# Altium PCB ESP32_Interfaces_Board_v02b1.PcbDoc
Units mm, origin at the board's own origin, x right, y up, seen from the top; angles counter-clockwise.
Board outline 89.05 x 84.48 mm, 2 copper layers (Top Layer, Bottom Layer), stack 0.325 mm thick; 53 components, 39 nets, 184 pads, 622 vias.
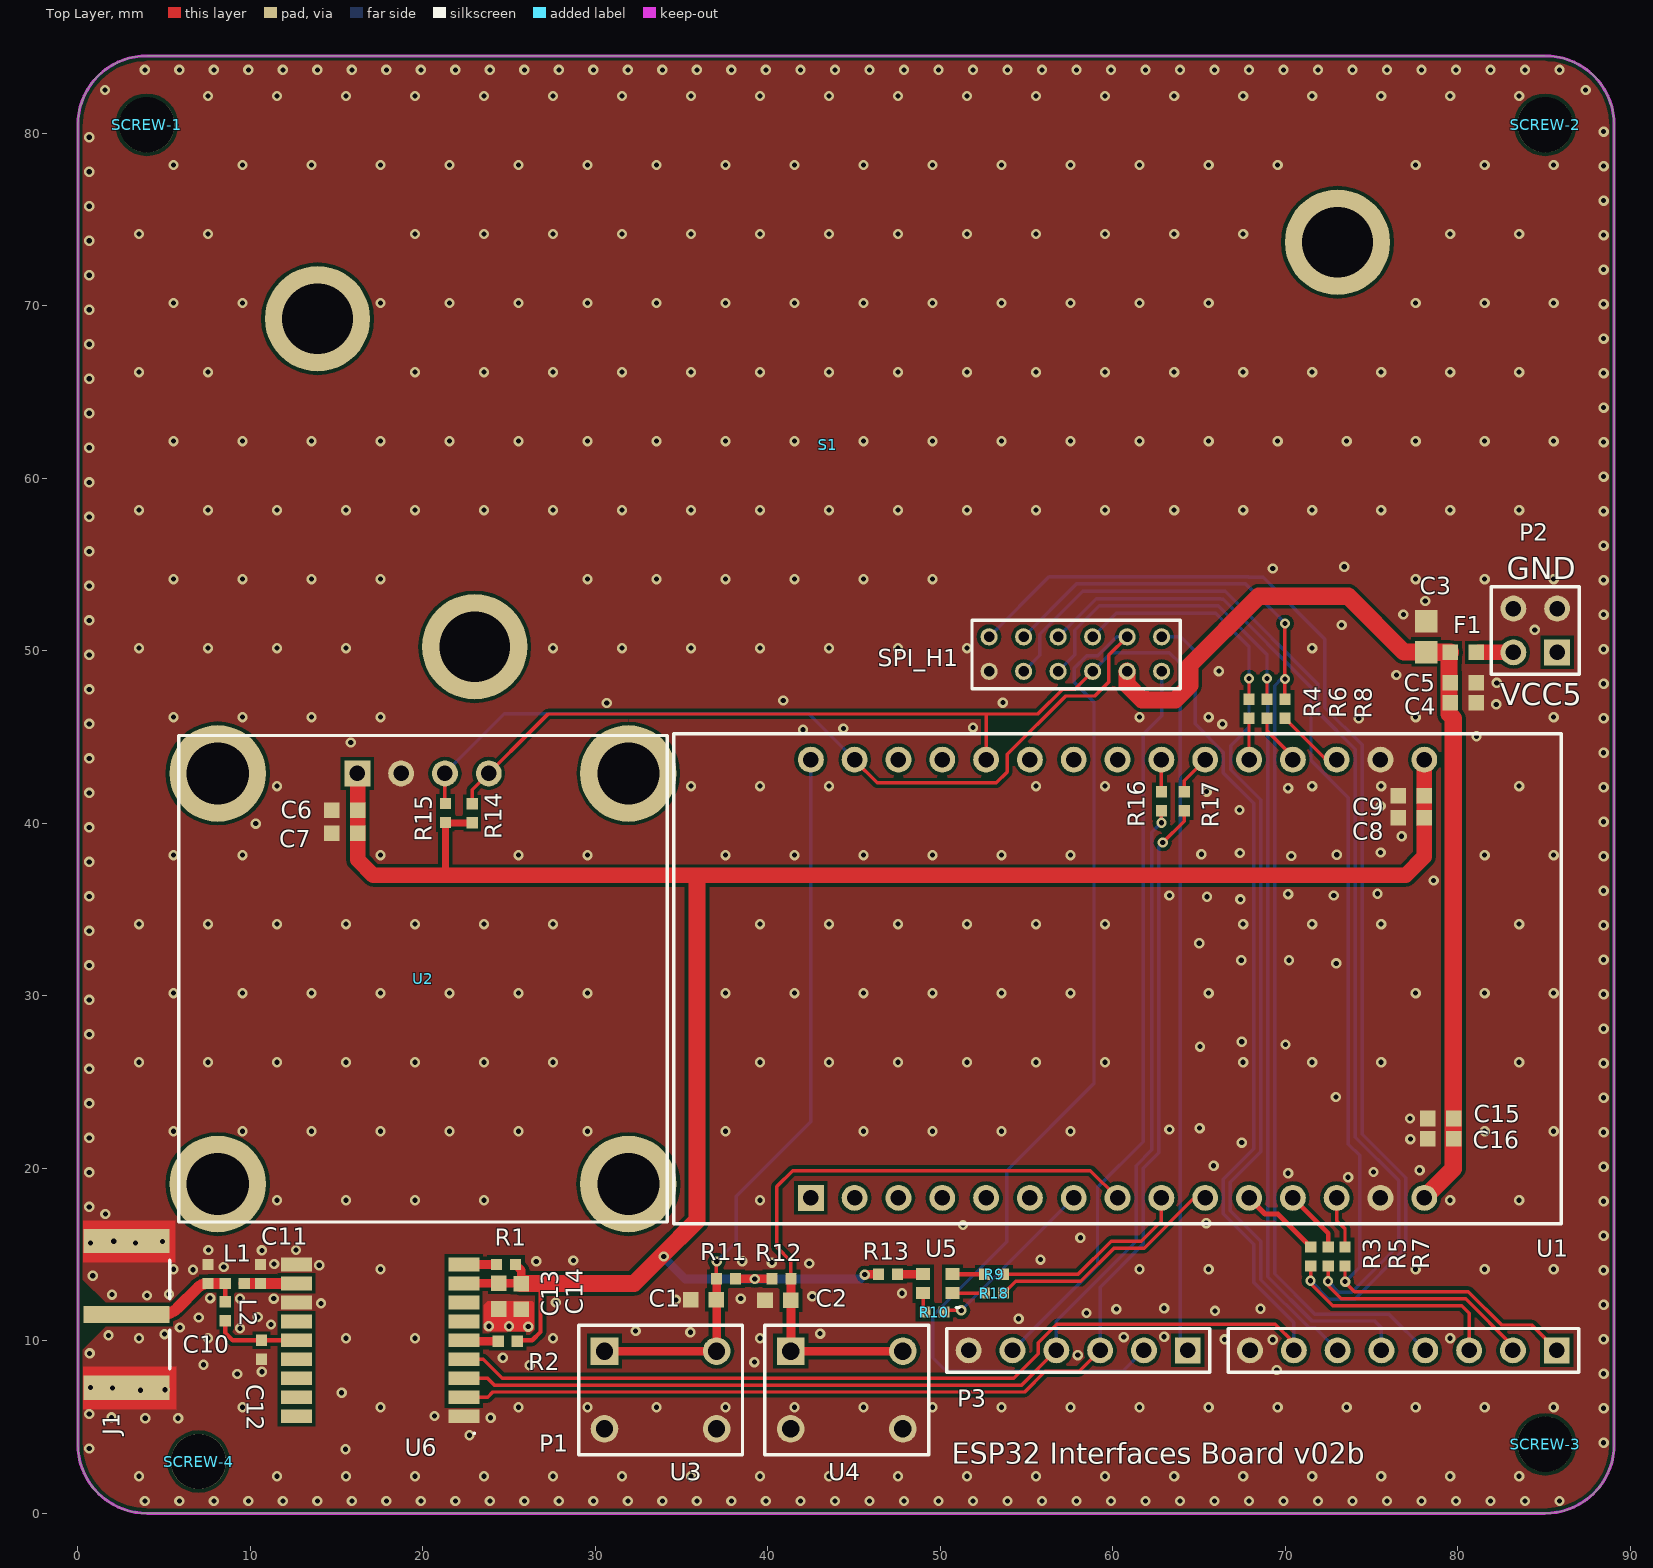
[diagram p0: Top Layer view]
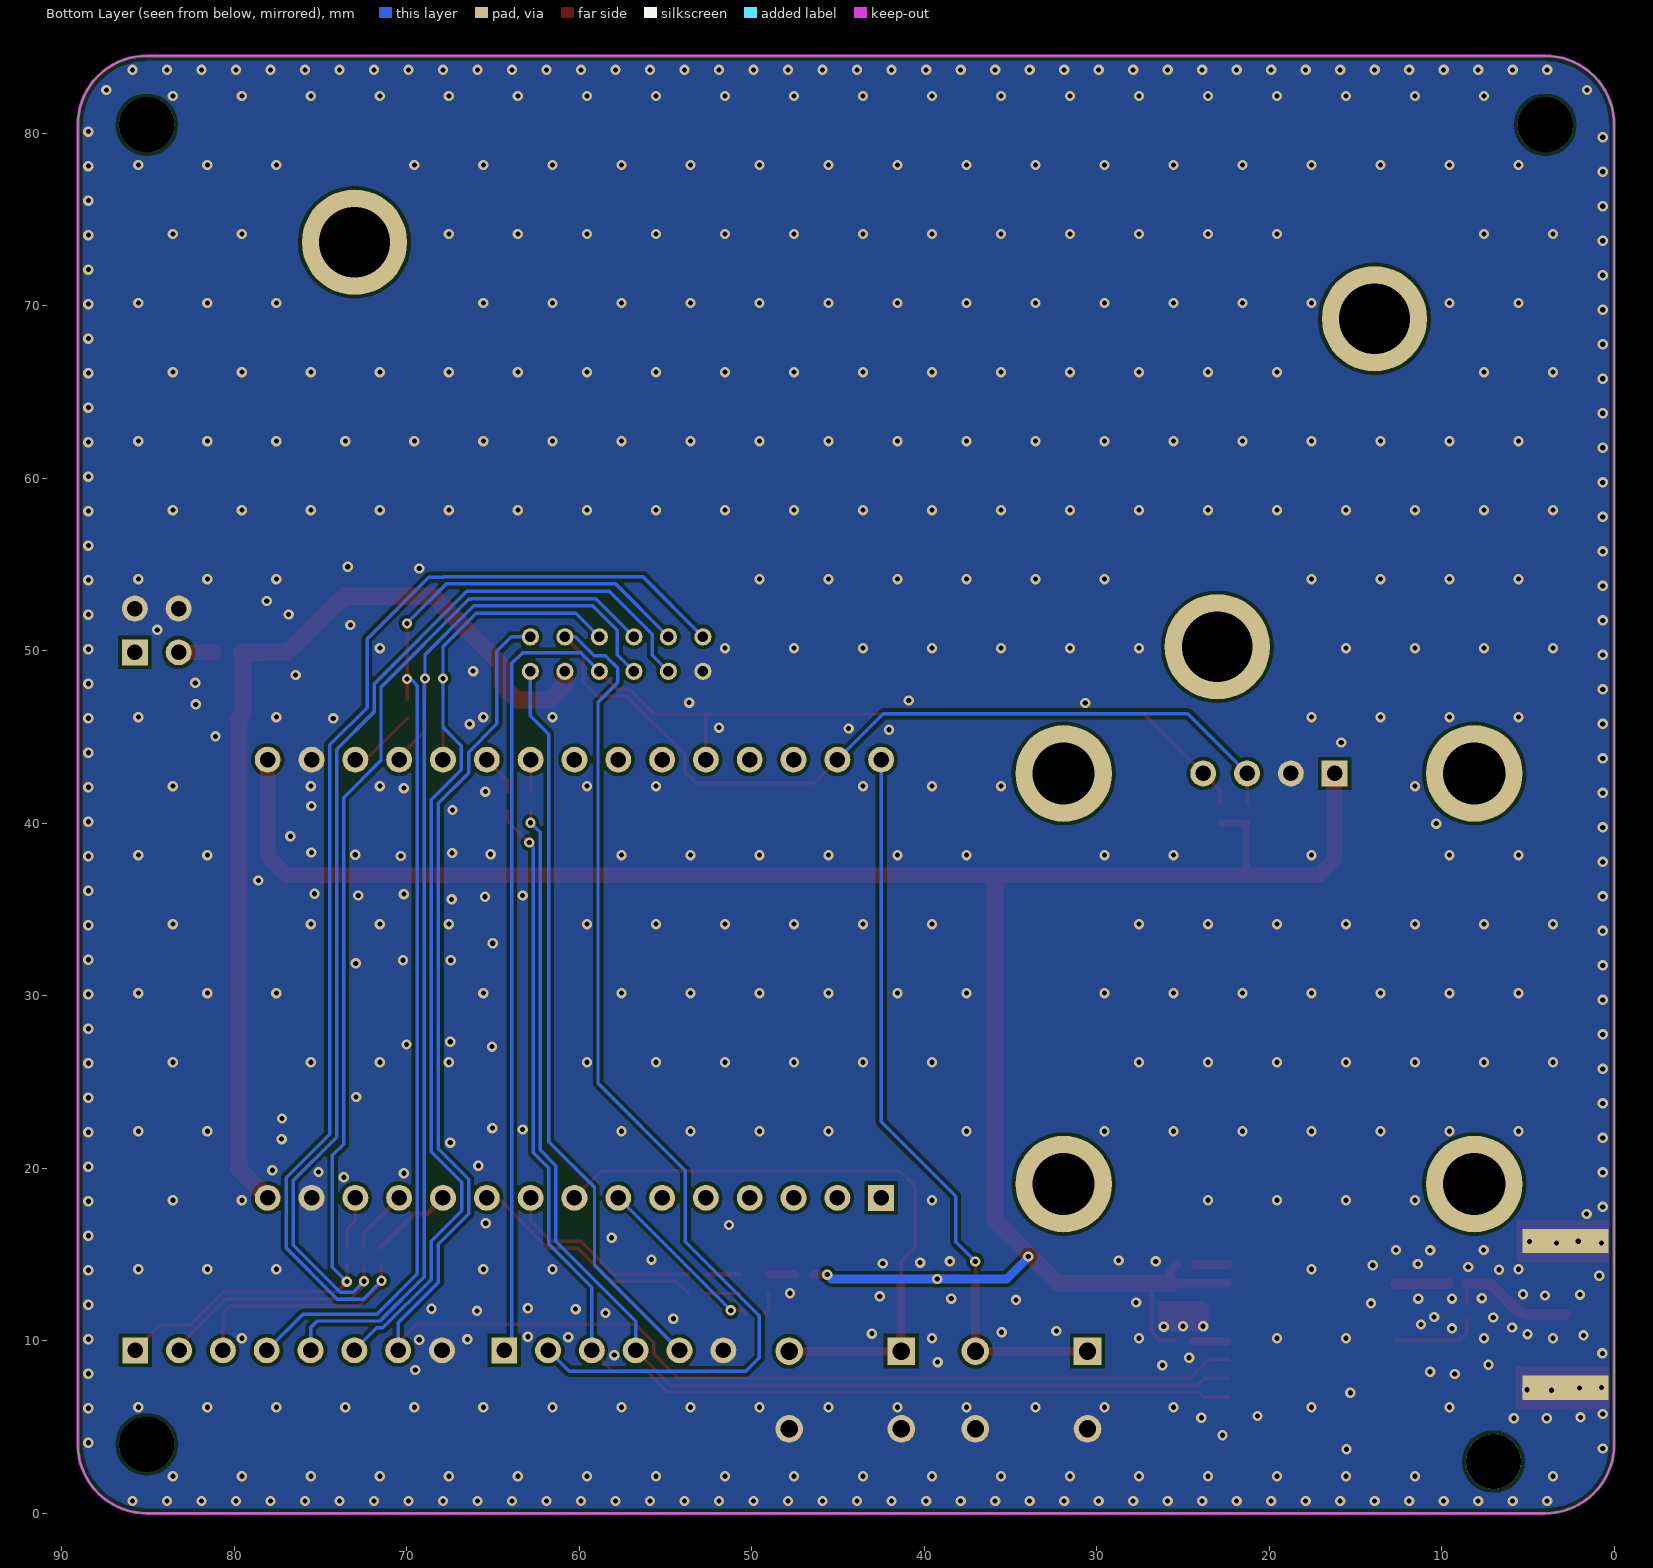
[diagram p1: Bottom Layer view, seen from below]

## Layer stack, top to bottom
Top Solder: solder mask 0.0102, Solder Resist, Dk 3.5
Top Layer: signal copper 0.0356
Dielectric 1: core 0.254, FR-4, Dk 4.2
Bottom Layer: signal copper 0.0356
Bottom Solder: solder mask 0.0102, Solder Resist, Dk 3.5

## Board outline
0,4 ccw(c4,4) 4,0 85.055,0 ccw(c85.055,4) 89.055,4 89.055,80.483 ccw(c85.055,80.483) 85.055,84.483 4,84.483 ccw(c4,80.483) 0,80.483

## Design rules (kind name [scope] priority, off if disabled: settings)
Clearance [All] p1: gap=0.203 ignorepadtopadclearanceinfootprint=FALSE
HoleSize [All] p1: absolutevalues=TRUE maxlimit=4 minlimit=0.025 maxpercent=80.000 minpercent=20.000
MinimumSolderMaskSliver [All] p1: minsoldermaskwidth=0.1
PolygonConnect [All] p1: connectstyle=Direct reliefconductorwidth=0.381 reliefentries=4 polygonreliefangle="90 Angle" airgapwidth=0.254
RoomDefinition ESP32-Interfacesv01a [InComponentClass('ESP32-Interfacesv01a')] p1: confinementstyle=ConfineOut formatcopy=TRUE lockcomponents=FALSE outline -27.946,1.932 -20.275,1.932 -20.275,15.089 -27.946,15.089
RoutingVias [All] p1: holewidth=0.3 width=0.6 viastyle="Through Hole" minholewidth=0.2 minwidth=0.4 maxholewidth=0.711 maxwidth=1.27
SilkToSilkClearance [All] p1: silktosilkclearance=0
SolderMaskExpansion [All] p1: expansion=0.05
Width [All] p1: maxlimit=1.27 minlimit=0.178 preferedwidth=0.254 minimp=50.000000 maximp=50.000000 favimp=50.000000
27 further rules are at their usual default settings.

## Components (designator, comment, footprint, x,y, rotation, side; value= is the part's Value field where it differs from the comment)
C1 "Cap" rlc_603_smd 36.265,12.371 r180 top value=100nF
C2 "Cap" rlc_603_smd 40.583,12.346 r180 top value=100nF
C3 "Cap" rlc_805_smd 78.156,50.819 r270 top value=10u
C4 "Cap" rlc_603_smd 80.315,46.983 r180 top value=100n
C5 "Cap" rlc_603_smd 80.315,48.152 r180 top value=100pF
C6 "Cap" rlc_603_smd 15.469,40.742 r180 top value=1uF
C7 "Cap" rlc_603_smd 15.469,39.421 r180 top value=100pF
C8 "Cap" rlc_603_smd 77.286,40.311 r180 top value=100pF
C9 "Cap" rlc_603_smd 77.286,41.581 r180 top value=1uF
C10 "Cap" rlc_402_smd 7.544,13.876 r90 top value=NC
C11 "Cap" rlc_402_smd 10.592,13.876 r270 top value=NC
C12 "Cap" rlc_402_smd 10.648,9.476 r90 top value=NC
C13 "Cap" rlc_603_smd 24.41,12.592 r90 top value=1uF
C14 "Cap" rlc_603_smd 25.705,12.566 r90 top value=100pF
C15 "Cap" rlc_603_smd 78.994,22.885 r180 top value=100pF
C16 "Cap" rlc_603_smd 78.994,21.717 r180 top value=1uF
F1 "Ferrite beads" rlc_603_smd 80.315,49.904 r180 top value=VAL?
J1 "32K145-400L5" ROS-32K145-400L5_V 0.32,11.525 r90 top locked
L1 "Inductor" rlc_402_smd 9.094,13.326 r0 top value=47nH
L2 "Inductor" rlc_402_smd 8.544,11.709 r270 top value=47nH
P1 "Header 8" HDR1X8 85.725,9.442 r180 top
P2 "Header 2X2" HDR2X2 85.751,49.904 r90 top
P3 "Header 6" HDR1X6 64.339,9.442 r180 top
R1 "Resistor" rlc_402_smd 24.816,14.421 r0 top value=NC
R2 "Resistor" rlc_402_smd 24.918,9.976 r0 top value=NC
R3 "Resistor" rlc_402_smd 71.47,14.886 r90 top value=22R
R4 "Resistor" rlc_402_smd 67.888,46.636 r90 top value=0R
R5 "Resistor" rlc_402_smd 72.486,14.886 r90 top value=22R
R6 "Resistor" rlc_402_smd 68.93,46.636 r90 top value=0R
R7 "Resistor" rlc_402_smd 73.451,14.886 r90 top value=22R
R8 "Resistor" rlc_402_smd 69.971,46.636 r90 top value=0R
R9 "Resistor" rlc_402_smd 53.111,13.862 r180 top value=1k
R10 "Resistor" rlc_402_smd 49.65,11.661 r0 top value=1k
R11 "Resistor" rlc_402_smd 37.567,13.59 r180 top value=100k
R12 "Resistor" rlc_402_smd 40.787,13.59 r0 top value=100K
R13 "Resistor" rlc_402_smd 46.965,13.862 r180 top value=0R
R14 "Resistor" rlc_402_smd 22.86,40.583 r90 top value=10K
R15 "Resistor" rlc_402_smd 21.311,40.589 r90 top value=10K
R16 "Resistor" rlc_402_smd 62.808,41.276 r270 top value=0R
R17 "Resistor" rlc_402_smd 64.129,41.276 r270 top value=0R
R18 "Resistor" rlc_402_smd 53.111,12.762 r180 top value=1k
S1 "GW_SHAPE" GW_SHAPE 73.017,73.677 r180 top locked
SCREW-1 "Logo symbol" screw-M3#1 4.013,81.077 r90 top
SCREW-2 "Logo symbol" SCREW-M3#1 84.963,78.207 r90 top
SCREW-3 "Logo symbol" screw-M3#2 88.468,-1.27 r90 top
SCREW-4 "Logo symbol" SCREW-M3#2 3.607,2.794 r90 top
SPI_H1 "Header 6X2" header_6_2_2.0 57.822,49.805 r0 top
U1 "ESP32_Devkit_V1" ESP32-DOIT-30 42.488,18.284 r90 top locked
U2 "JMD0.96-12864" JMD0.96_12864 23.822,43.384 r270 top locked
U3 "Button1" "TACT SWITCH_8HA-A-S1-01 - DUPLICATE" 30.527,9.399 r0 top
U4 "Button2" "TACT SWITCH_8HA-A-S1-01 - DUPLICATE" 41.322,9.399 r0 top
U5 "FM-B2020RGBA-HG" RGB_2020 48.999,13.862 r0 top
U6 "ATGM336H-GPS" ATGM336H 17.526,10.026 r180 top

## Footprints (in the part's own frame and the unit in brackets; to place one, negate y for a bottom-side part, rotate by r counter-clockwise, add the part's x,y. Pads: shape width x height; smd on the part's side, far side on the other; paste and mask are expansions set on the pad)
ATGM336H [mm] "Chip Array, Flat, 18-Leads, Pitch 1.10mm,  Body 10.10x9.70mm,  IPC Medium Density"
  rect 1.8x0.8 smd: 1(-4.85,4.4) 2(-4.85,3.3) 3(-4.85,2.2) 4(-4.85,1.1) 5(-4.85,0) 6(-4.85,-1.1) 7(-4.85,-2.2) 8(-4.85,-3.3) 9(-4.85,-4.4) 10(4.85,-4.4) 11(4.85,-3.3) 12(4.85,-2.2) 13(4.85,-1.1) 14(4.85,0) 15(4.85,1.1) 16(4.85,2.2) 17(4.85,3.3) 18(4.85,4.4)
  silkscreen extent -5.51,5.34 -5.41,5.44, body extent -4.85,-5.05 4.85,5.05, height 3
ESP32-DOIT-30 [mm]
  rect 1.5x1.5 hole 0.9: 1(0,0)
  round 1.5 hole 0.9: 2(0,-2.54) 3(0,-5.08) 4(0,-7.62) 5(0,-10.16) 6(0,-12.7) 7(0,-15.24) 8(0,-17.78) 9(0,-20.32) 10(0,-22.86) 11(0,-25.4) 12(0,-27.94) 13(0,-30.48) 14(0,-33.02) 15(0,-35.56) 16(25.4,-35.56) 17(25.4,-33.02) 18(25.4,-30.48) 19(25.4,-27.94) 20(25.4,-25.4) 21(25.4,-22.86) 22(25.4,-20.32) 23(25.4,-17.78) 24(25.4,-15.24) 25(25.4,-12.7) 26(25.4,-10.16) 27(25.4,-7.62) 28(25.4,-5.08) 29(25.4,-2.54) 30(25.4,0)
  silkscreen extent -1.5,-43.51 26.9,7.95
GW_SHAPE [mm]
  round 6.1 hole 4.1: 1(0,0) 1(50.013,23.453) 1(59.119,4.435)
HDR1X6 [mm] "Connector; Header; 6 Position"
  rect 1.5x1.5 hole 0.9: 1(0,0)
  round 1.5 hole 0.9: 2(2.54,0) 3(5.08,0) 4(7.62,0) 5(10.16,0) 6(12.7,0)
  silkscreen extent -1.27,-1.27 13.97,1.27
HDR1X8 [mm] "Connector; Header; 8 Position"
  rect 1.5x1.5 hole 0.9: 1(0,0)
  round 1.5 hole 0.9: 2(2.54,0) 3(5.08,0) 4(7.62,0) 5(10.16,0) 6(12.7,0) 7(15.24,0) 8(17.78,0)
  silkscreen extent -1.27,-1.27 19.05,1.27
HDR2X2 [mm] "Connector; Header; 2x2 Position"
  rect 1.5x1.5 hole 0.9: 1(0,0)
  round 1.5 hole 0.9: 2(0,2.54) 3(2.54,0) 4(2.54,2.54)
  silkscreen extent -1.27,-1.27 3.81,3.81
header_6_2_2.0 [mm] "2.0,header 6*2"
  round 1 hole 0.6: 1(-5,-1) 2(-5,1) 3(-3,-1) 4(-3,1) 5(-1,-1) 6(-1,1) 7(1,-1) 8(1,1) 9(3,-1) 10(3,1) 11(5,-1) 12(5,1)
  silkscreen extent -5.99,-2.01 6.08,1.95
JMD0.96_12864 [mm]
  rect 1.5x1.5 hole 0.9: 1(0.5,-7.62)
  round 1.5 hole 0.9: 2(0.5,-5.08) 3(0.5,-2.54) 4(0.5,0)
  round 5.6 hole 3.6: ""(0.5,8.09) ""(0.5,-15.71) ""(24.3,8.09) ""(24.3,-15.71)
  silkscreen extent -1.7,-17.96 26.5,10.34
RGB_2020 [mm]
  rect 0.8x0.7 smd: 1(1.7,-1.1) 2(0,-1.1) 3(0,0) 4(1.7,0)
  silkscreen extent 1.9,-1.93 2.1,-1.93
rlc_402_smd [mm] "Chip SMD component 402; Body 1.0 x 0.5 mm (LxW typ)"
  rect 0.65x0.65 smd mask+0.05: 1(-0.55,0) 2(0.55,0)
  body extent -0.87,-0.33 0.87,0.33, height 0.8
rlc_603_smd [mm] "Chip SMD component 603; Body 1.6 x 0.8mm (LxW typ)"
  rect 0.9x0.9 smd paste+0 mask+0.05: 1(-0.75,0) 2(0.75,0)
rlc_805_smd [mm] "Chip SMD component 805; Body 2.0 x 1.25 mm (LxW typ)"
  rect 1.3x1.3 smd mask+0.05: 1(-0.9,0) 2(0.9,0)
ROS-32K145-400L5_V [mm] "SMA Right Angle Jack, Edge Mount, 14.25x9.5x4.46mm, Rosenberger Recommended"
  rect 1x5 smd: 1(0,-2.5)
  rect 1.4x5 smd: MP(-4.25,-2.5) MP(4.25,-2.5)
  rect 1.4x5 smd far side paste-2: ""(-4.25,-2.5) ""(4.25,-2.5)
  silkscreen extent -3.15,-5 3.15,-5, body extent -4.75,-4.75 4.75,9.5, height 4.46
screw-M3#1 [mm] "for M3"
  round 3.2 hole 3.2: 1(-0.594,0.013)
screw-M3#2 [mm] "for M3"
  round 3.2 hole 3.2: 1(5.27,3.413)
SCREW-M3#1 [mm] "for M3"
  round 3.2 hole 3.2: 1(2.276,-0.092)
SCREW-M3#2 [mm] "for M3"
  round 3.2 hole 3.2: 1(0.206,-3.393)
"TACT SWITCH_8HA-A-S1-01 - DUPLICATE" [mm]
  rect 1.6x1.6 hole 1: 1(0,0)
  round 1.6 hole 1: 2(6.5,0) 3(0,-4.5) 4(6.5,-4.5)
  silkscreen extent -1.5,-6 8,1.5

## Part data
C1 C2 C3 C4 C5 C6 C7 C8 C9 C10 C11 C12 C13 C14 C15 C16: "Capacitor SMD", LatestRevisionDate="05-oct-2007  -  Semtech", LatestRevisionNote="Re-released for DXP Platform.", Published=8-Jun-2000, Publisher="Altium Limited"
J1: "SMA Right Angle Jack, Edge Mount, Up to 18 GHz, -55 to 155 degC", ComponentLink1Description="Manufacturer URL", ComponentLink1URL=http://www.rosenberger.de, ComponentLink2Description=Datasheet, ComponentLink2URL=http://rosenberger.de/ok/images/documents/db/32K145-400L5.pdf, ComponentLink3Description="Package Specification", ComponentLink3URL=http://rosenberger.de/ok/images/documents/db/32K145-400L5.pdf, ComponentLink4Description="Series Overview / Design Note", ComponentLink4URL=http://rosenberger.de/ok/images/documents/spez/32.pdf, ComponentLink5Description="Webshop / RFQ", ComponentLink5URL=http://www.rosenberger.com/en/contact/sales/, DatasheetVersion=b00, Desgin Note 2="For more information about DRC setting, please look at following webpage, http://techdocs.altium.com/display/SCRT/Design+Rule+for+Edge-Mount+Connectors", Design Note 1="Footprint in library is a generic example - only application specific footprint delivers High Performance", Mounting Technology="Surface Mount", PackageDescription="SMA Right Angle Jack, Edge Mount, 14.25 x 9.5 x 4.46 mm", PackageReference=32K145-400L5, PackageVersion=b00, PartNumber=32K145-400L5
L1 L2: "Inductor SMD", Code_IEC=1005, Code_JEITA=0402, LatestRevisionDate="05-oct-2007  -  Semtech", LatestRevisionNote="Re-released for DXP Platform.", Published=8-Jun-2000, Publisher="Altium Limited"
P1: "Header, 8-Pin", LatestRevisionDate=17-Jul-2002, LatestRevisionNote="Re-released for DXP Platform.", Publisher="Altium Limited"
P2: "Header, 2-Pin, Dual row", LatestRevisionDate=17-Jul-2002, LatestRevisionNote="Re-released for DXP Platform.", Publisher="Altium Limited"
P3: "Header, 6-Pin", LatestRevisionDate=17-Jul-2002, LatestRevisionNote="Re-released for DXP Platform.", Publisher="Altium Limited"
R1 R2 R3 R4 R5 R6 R7 R8 R9 R10 R11 R12 R13 R14 R15 R16 R17 R18: "Resistor SMD - IEC symbol version", LatestRevisionDate="27-Jul-20  -  Semtech"
SCREW-1 SCREW-2 SCREW-3 SCREW-4: library part Logo, "Schematic symbol for Logo"
SPI_H1: "Header, 12-Pin, Dual row", LatestRevisionDate=17-Jul-2002, LatestRevisionNote="Re-released for DXP Platform.", Publisher="Altium Limited"
U2: library part 0.96oled-12864
U3 U4: library part "TACT SWITCH_8HA-A-S1-01"
U5: library part RGB_LED
U6: library part ATGM336H
S1: LatestRevisionDate=17-Jul-2002, LatestRevisionNote="Re-released for DXP Platform.", Publisher="Altium Limited"

## Via types
v1: diameter 0.6/0.6 (per signal layer), hole 0.3, Top Layer to Bottom Layer, tented both sides, 315 vias
v2: diameter 0.6, hole 0.3, Top Layer to Bottom Layer, tented both sides, 307 vias

## Nets (pads, with @x,y where several pads share a name; then routed paths per layer and width w, separated by ;. In a path a pad name is that pad's centre, name@x,y a point inside that pad or via, vN(x,y) a via of type N, cw(c..) or ccw(c..) an arc to the next point about the centre after c; other vN are vias at no path point)
1PPS: P1.7 SPI_H1.12 U6.4 | length 97.8
  Top Layer w0.2: U6.4 23.503,8.926 24.591,7.839 54.252,7.839 55.665,9.253 55.665,9.878 56.753,10.966 69.419,10.966 70.485,9.899 P1.7
  Bottom Layer w0.2: SPI_H1.12 63.927,50.805 64.767,49.965 64.767,45.755 66.402,44.121 66.402,42.914 68.166,41.15 68.166,21.128 66.402,19.364 66.402,17.364 68.166,15.6 68.166,13.379 70.485,11.059 P1.7
EN-Pwr: P1.6 R4.2 SPI_H1.8 | length 57.1
  Top Layer w0.2: R4.2 v2(67.888,48.388)
  Bottom Layer w0.2: SPI_H1.8 60.189,52.172 65.958,52.172 67.888,50.241 v2(67.888,48.388) 67.888,45.555 66.835,44.502 66.835,43.09 68.569,41.356 68.569,20.961 66.805,19.197 66.805,17.531 68.569,15.767 68.569,13.546 71.37,10.744 71.724,10.744 P1.6
GND: C1.2 C2.2 C3.1 C4.1 C5.1 C6.2 C7.2 C8.2 C9.2 C10.2 C11.1 C12.1 C13.1 C14.1 C15.2 C16.2 J1. J1.MP P1.8 P2.3 P2.4 P3.6 SPI_H1.1 U1.14 U1.17 U2.2 U3.3 U3.4 U4.3 U4.4 U6.1 U6.10 U6.12
  other v1: 3.545,2.15 11.545,2.15 15.545,2.15 19.545,2.15 23.545,2.15 27.545,2.15 31.545,2.15 35.545,2.15 39.545,2.15 43.545,2.15 47.545,2.15 51.545,2.15 55.545,2.15 59.545,2.15 63.545,2.15 67.545,2.15 71.545,2.15 75.545,2.15 79.545,2.15 83.545,2.15 9.545,6.15 17.545,6.15 25.545,6.15 29.545,6.15 33.545,6.15 37.545,6.15 41.545,6.15 45.545,6.15 49.545,6.15 53.545,6.15 57.545,6.15 61.545,6.15 65.545,6.15 69.545,6.15 73.545,6.15 77.545,6.15 81.545,6.15 85.545,6.15 3.545,10.15 7.545,10.15 15.545,10.15 19.545,10.15 27.545,10.15 39.545,10.15 79.545,10.15 5.545,14.15 17.545,14.15 61.545,14.15 65.545,14.15 77.545,14.15 81.545,14.15 85.545,14.15 11.545,18.15 15.545,18.15 19.545,18.15 23.545,18.15 39.545,18.15 79.545,18.15 83.545,18.15 5.545,22.15 9.545,22.15 13.545,22.15 17.545,22.15 21.545,22.15 25.545,22.15 29.545,22.15 37.545,22.15 45.545,22.15 49.545,22.15 53.545,22.15 57.545,22.15 81.545,22.15 85.545,22.15 3.545,26.15 7.545,26.15 11.545,26.15 15.545,26.15 19.545,26.15 23.545,26.15 27.545,26.15 39.545,26.15 43.545,26.15 47.545,26.15 51.545,26.15 55.545,26.15 59.545,26.15 67.545,26.15 71.545,26.15 75.545,26.15 83.545,26.15 5.545,30.15 9.545,30.15 13.545,30.15 17.545,30.15 21.545,30.15 25.545,30.15 29.545,30.15 37.545,30.15 41.545,30.15 45.545,30.15 49.545,30.15 53.545,30.15 57.545,30.15 65.545,30.15 77.545,30.15 81.545,30.15 85.545,30.15 3.545,34.15 7.545,34.15 11.545,34.15 15.545,34.15 19.545,34.15 23.545,34.15 27.545,34.15 39.545,34.15 43.545,34.15 47.545,34.15 51.545,34.15 55.545,34.15 59.545,34.15 67.545,34.15 71.545,34.15 75.545,34.15 83.545,34.15 5.545,38.15 9.545,38.15 17.545,38.15 25.545,38.15 29.545,38.15 37.545,38.15 41.545,38.15 45.545,38.15 49.545,38.15 53.545,38.15 57.545,38.15 81.545,38.15 85.545,38.15 11.545,42.15 35.545,42.15 39.545,42.15 43.545,42.15 55.545,42.15 59.545,42.15 71.545,42.15 75.545,42.15 83.545,42.15 5.545,46.15 9.545,46.15 13.545,46.15 17.545,46.15 61.545,46.15 65.545,46.15 77.545,46.15 85.545,46.15 3.545,50.15 7.545,50.15 11.545,50.15 15.545,50.15 27.545,50.15 31.545,50.15 35.545,50.15 39.545,50.15 43.545,50.15 47.545,50.15 51.545,50.15 71.545,50.15 5.545,54.15 9.545,54.15 13.545,54.15 17.545,54.15 29.545,54.15 33.545,54.15 37.545,54.15 41.545,54.15 45.545,54.15 49.545,54.15 77.545,54.15 81.545,54.15 85.545,54.15 3.545,58.15 7.545,58.15 11.545,58.15 15.545,58.15 19.545,58.15 23.545,58.15 27.545,58.15 31.545,58.15 35.545,58.15 39.545,58.15 43.545,58.15 47.545,58.15 51.545,58.15 55.545,58.15 59.545,58.15 63.545,58.15 67.545,58.15 71.545,58.15 75.545,58.15 79.545,58.15 83.545,58.15 5.545,62.15 9.545,62.15 13.545,62.15 17.545,62.15 21.545,62.15 25.545,62.15 29.545,62.15 33.545,62.15 37.545,62.15 41.545,62.15 45.545,62.15 49.545,62.15 53.545,62.15 57.545,62.15 61.545,62.15 65.545,62.15 69.545,62.15 73.545,62.15 77.545,62.15 81.545,62.15 85.545,62.15 3.545,66.15 7.545,66.15 19.545,66.15 23.545,66.15 27.545,66.15 31.545,66.15 35.545,66.15 39.545,66.15 43.545,66.15 47.545,66.15 51.545,66.15 55.545,66.15 59.545,66.15 63.545,66.15 67.545,66.15 71.545,66.15 75.545,66.15 79.545,66.15 83.545,66.15 5.545,70.15 9.545,70.15 17.545,70.15 21.545,70.15 25.545,70.15 29.545,70.15 33.545,70.15 37.545,70.15 41.545,70.15 45.545,70.15 49.545,70.15 53.545,70.15 57.545,70.15 61.545,70.15 65.545,70.15 77.545,70.15 81.545,70.15 85.545,70.15 3.545,74.15 7.545,74.15 19.545,74.15 23.545,74.15 27.545,74.15 31.545,74.15 35.545,74.15 39.545,74.15 43.545,74.15 47.545,74.15 51.545,74.15 55.545,74.15 59.545,74.15 63.545,74.15 67.545,74.15 79.545,74.15 83.545,74.15 5.545,78.15 9.545,78.15 13.545,78.15 17.545,78.15 21.545,78.15 25.545,78.15 29.545,78.15 33.545,78.15 37.545,78.15 41.545,78.15 45.545,78.15 49.545,78.15 53.545,78.15 57.545,78.15 61.545,78.15 65.545,78.15 69.545,78.15 77.545,78.15 81.545,78.15 85.545,78.15 7.545,82.15 11.545,82.15 15.545,82.15 19.545,82.15 23.545,82.15 27.545,82.15 31.545,82.15 35.545,82.15 39.545,82.15 43.545,82.15 47.545,82.15 51.545,82.15 55.545,82.15 59.545,82.15 63.545,82.15 67.545,82.15 71.545,82.15 75.545,82.15 79.545,82.15 83.545,82.15
  other v2: 3.886,0.711 5.886,0.711 7.886,0.711 9.886,0.711 11.886,0.711 13.886,0.711 15.886,0.711 17.886,0.711 19.886,0.711 21.886,0.711 23.886,0.711 25.886,0.711 27.886,0.711 29.886,0.711 31.886,0.711 33.886,0.711 35.886,0.711 37.886,0.711 39.886,0.711 41.886,0.711 43.886,0.711 45.886,0.711 47.886,0.711 49.886,0.711 51.886,0.711 53.886,0.711 55.886,0.711 57.886,0.711 59.886,0.711 61.886,0.711 63.886,0.711 65.886,0.711 67.886,0.711 69.886,0.711 71.886,0.711 73.886,0.711 75.886,0.711 77.886,0.711 79.886,0.711 81.886,0.711 83.886,0.711 85.886,0.711 15.519,3.708 0.66,3.759 88.443,4.089 22.708,4.521 3.912,5.512 5.817,5.512 23.927,5.537 1.956,5.563 20.676,5.639 0.66,5.759 88.443,6.089 15.291,6.985 3.632,7.137 5.055,7.163 2.007,7.264 0.737,7.29 9.246,8.077 88.443,8.089 10.668,8.204 69.494,8.306 26.187,8.585 7.29,8.611 39.218,8.763 24.638,9.017 57.963,9.169 0.686,9.271 69.266,10.058 66.472,10.084 88.443,10.089 60.63,10.211 62.967,10.236 1.778,10.312 5.029,10.389 43.028,10.414 35.509,10.49 32.334,10.566 9.398,10.719 5.918,10.77 26.111,10.82 23.825,10.846 24.994,10.846 11.201,10.947 54.534,11.278 7.01,11.354 10.439,11.379 58.471,11.608 65.913,11.735 60.198,11.836 68.555,11.862 62.967,11.887 88.443,12.089 14.097,12.167 27.711,12.217 34.671,12.37 9.398,12.446 11.354,12.446 38.43,12.446 7.671,12.471 42.57,12.573 4.013,12.624 1.981,12.675 5.283,12.7 47.777,12.751 0.864,13.767 88.443,14.089 6.68,14.122 8.458,14.275 13.995,14.376 11.379,14.453 42.393,14.478 40.234,14.529 26.568,14.605 38.506,14.605 28.727,14.656 55.804,14.707 10.668,15.24 7.569,15.265 12.649,15.265 0.737,15.672 3.353,15.672 4.902,15.748 2.083,15.773 58.115,15.977 88.443,16.089 51.308,16.713 65.405,16.815 1.6,17.348 0.66,17.759 88.443,18.089 73.635,19.482 70.155,19.71 0.66,19.759 75.108,19.787 77.775,19.888 88.443,20.089 65.837,20.142 67.462,21.488 77.241,21.692 0.66,21.759 88.443,22.089 63.271,22.25 65.024,22.327 77.216,22.885 0.66,23.759 88.443,24.089 72.923,24.13 0.66,25.759 88.443,26.089 65.049,27.051 70.002,27.178 67.462,27.33 0.66,27.759 88.443,28.089 0.66,29.759 88.443,30.089 0.66,31.759 72.949,31.877 67.437,32.055 70.206,32.055 88.443,32.089 64.999,33.045 0.66,33.759 88.443,34.089 67.386,35.585 65.456,35.738 0.66,35.759 63.271,35.814 72.796,35.814 70.155,35.89 75.336,35.916 88.443,36.089 78.588,36.678 0.66,37.759 88.443,38.089 70.333,38.1 72.974,38.176 65.126,38.202 67.361,38.278 75.514,38.303 76.733,39.243 0.66,39.759 10.312,39.98 88.443,40.089 67.335,40.767 75.514,40.996 0.66,41.759 65.43,41.834 70.155,42.037 88.443,42.089 0.66,43.759 88.443,44.089 15.824,44.679 81.077,45.034 42.037,45.415 44.374,45.491 51.892,45.542 0.66,45.759 66.345,45.745 74.244,46.076 88.443,46.089 82.22,46.888 30.658,46.965 53.619,46.99 40.894,47.117 0.66,47.759 88.443,48.089 82.245,48.133 76.429,48.59 66.142,48.819 0.66,49.759 88.443,50.089 84.455,51.206 73.254,51.486 0.66,51.759 88.443,52.089 76.835,52.095 78.105,52.883 0.66,53.759 88.443,54.089 69.266,54.762 73.406,54.864 0.66,55.759 88.443,56.089 0.66,57.759 88.443,58.089 0.66,59.759 88.443,60.089 0.66,61.759 88.443,62.089 0.66,63.759 88.443,64.089 0.66,65.759 88.443,66.089 0.66,67.759 88.443,68.089 0.66,69.759 88.443,70.089 0.66,71.759 88.443,72.089 0.66,73.759 88.443,74.089 0.66,75.759 88.443,76.089 0.66,77.759 88.443,78.089 0.66,79.759 88.443,80.089 1.575,82.499 87.401,82.499 3.886,83.668 5.886,83.668 7.886,83.668 9.886,83.668 11.886,83.668 13.886,83.668 15.886,83.668 17.886,83.668 19.886,83.668 21.886,83.668 23.886,83.668 25.886,83.668 27.886,83.668 29.886,83.668 31.886,83.668 33.886,83.668 35.886,83.668 37.886,83.668 39.886,83.668 41.886,83.668 43.886,83.668 45.886,83.668 47.886,83.668 49.886,83.668 51.886,83.668 53.886,83.668 55.886,83.668 57.886,83.668 59.886,83.668 61.886,83.668 63.886,83.668 65.886,83.668 67.886,83.668 69.886,83.668 71.886,83.668 73.886,83.668 75.886,83.668 77.886,83.668 79.886,83.668 81.886,83.668 83.886,83.668 85.886,83.668
GPS_NRST: P3.5 SPI_H1.11 | length 43
  Bottom Layer w0.2: P3.5@54.135,9.486 P3.5 59.106,14.37 59.106,18.891 61.755,21.54 61.755,45.169 62.822,46.236 SPI_H1.11
LED_Blue: R10.2 U1.7 | length 10.2
  Top Layer w0.2: R10.2@50.327,11.559 50.529,11.76 v2(51.206,11.76)
  Bottom Layer w0.2: v2@51.205,11.761 U1.7
LED_Green: R9.1 U1.9 | length 11.8
  Top Layer w0.2: R9.1 57.977,13.862 59.893,15.778 61.646,15.778 62.808,16.941 U1.9
LED_Red: R18.1 U1.10 | length 14
  Top Layer w0.2: R18.1 54.358,13.459 58.144,13.459 60.06,15.375 61.813,15.375 64.723,18.284 U1.10
MISO: P1.2 R5.1 SPI_H1.3 | length 75.4
  Top Layer w0.2: R5.1 72.486,13.182 73.227,12.441 80.441,12.441 83.185,9.696 P1.2
  Bottom Layer w0.2: SPI_H1.3 55.753,49.736 55.753,50.952 58.242,53.442 66.502,53.442 71.885,48.059 71.885,46.448 74.052,44.28 74.052,21.801 76.562,19.292 76.562,15.544 73.838,12.82 73.102,12.82 v2(72.467,13.455)
MOSI: P1.1 R7.1 SPI_H1.6 | length 68.6
  Top Layer w0.2: R7.1 73.451,13.397 74.004,12.844 80.608,12.844 82.536,10.915 84.278,10.915 85.725,9.468 P1.1
  Top Layer w0.254: R7.1@73.432,14.316 R7.1
  Bottom Layer w0.2: SPI_H1.6 59.002,52.984 59.018,52.984 59.04,53.007 66.263,53.007 66.285,52.984 66.389,52.984 71.482,47.892 71.482,43.65 73.649,41.483 73.649,21.392 74.295,20.745 74.295,14.268 v2(73.457,13.43)
NetC10_1: C10.1 J1.1 L1.1 L2.1 | length 7.7
  Top Layer w0.254: J1.1@2.617,11.525 J1.1 ; L2.1 L1.1
  Top Layer w0.65: J1.1 4.891,11.525 ccw(c4.891,12.762) 5.766,11.887 6.965,13.087 cw(c7.544,12.508) C10.1 L1.1
NetC11_2: C11.2 L1.2 U6.11 | length 3
  Top Layer w0.65: L1.2 C11.2 U6.11
NetC12_2: C12.2 L2.2 U6.14 | length 5
  Top Layer w0.254: L2.2 8.544,10.456 8.973,10.026 C12.2 U6.14
NetF1_1: F1.1 P2.2 | length 2
  Top Layer w0.9: F1.1@81.218,49.904 P2.2
NetR1_1: R1.1 U6.9 | length 1.9
  Top Layer w0.5: U6.9 22.382,14.421 R1.1
NetR2_1: R2.1 U6.5 | length 2
  Top Layer w0.5: U6.5@22.402,9.976 R2.1 R2.1@24.393,9.976
NetR3_2: R3.2 U1.11 | length 4.8
  Top Layer w0.3: U1.11 68.82,17.353 69.553,17.353 R3.2
NetR4_1: R4.1 U1.20 | length 2.4
  Top Layer w0.2: U1.20 R4.1
NetR5_2: R5.2 U1.12 | length 3.7
  Top Layer w0.254: U1.12 72.486,16.227 R5.2
NetR6_1: R6.1 U1.19 | length 3
  Top Layer w0.2: R6.1 68.93,45.366 70.428,43.867 U1.19
NetR7_2: R7.2 U1.13 | length 3
  Top Layer w0.2: U1.13 72.968,16.967 73.451,16.484 R7.2
NetR8_1: R8.1 U1.18 | length 4
  Top Layer w0.2: R8.1 72.372,43.684 U1.18
NetR9_2: R9.2 U5.4 | length 1.9
  Top Layer w0.254: U5.4 R9.2
NetR10_1: R10.1 U5.2 | length 1.3
  Top Layer w0.2: U5.2 48.999,11.788 R10.1@49.227,11.559
NetR13_1: R13.1 U5.3 | length 1.5
  Top Layer w0.5: R13.1 U5.3
NetR16_1: R16.1 U1.22 | length 1.9
  Top Layer w0.2: R16.1 U1.22
NetR17_1: R17.1 U1.21 | length 2.4
  Top Layer w0.2: R17.1 64.129,42.465 U1.21
NetR18_2: R18.2 U5.1 | length 1.9
  Top Layer w0.2: U5.1 R18.2
NRESET: P1.5 R6.2 SPI_H1.5 | length 62.1
  Top Layer w0.2: R6.2 v2(68.93,48.388)
  Bottom Layer w0.2: SPI_H1.5 57.785,49.768 57.785,51.181 59.207,52.603 66.096,52.603 68.93,49.77 v2(68.93,48.388) 68.972,48.346 68.972,13.713 71.537,11.147 75.181,11.147 75.565,10.763 P1.5
NSS: P1.4 R8.2 SPI_H1.4 | length 67.2
  Top Layer w0.2: R8.2 v2(69.971,48.363) 69.971,51.575 v2(69.977,51.581)
  Bottom Layer w0.2: SPI_H1.4 57.891,53.873 67.685,53.873 v2(69.977,51.581) ; v2(69.971,48.363) 69.768,48.363 69.375,47.97 69.375,13.88 71.705,11.55 75.997,11.55 P1.4
RXD: P3.3 R17.2 U6.2 | length 71.3
  Top Layer w0.2: U6.2 23.751,6.726 24.057,7.032 54.879,7.032 56.07,8.223 58.039,8.223 P3.3 ; v2(62.891,38.881) 64.129,40.119 R17.2
  Bottom Layer w0.2: P3.3 59.259,13.114 61.755,15.61 61.755,19.991 62.659,20.894 62.659,38.649 v2(62.891,38.881)
SCK: P1.3 R3.1 SPI_H1.2 | length 79.9
  Top Layer w0.2: R3.1 71.47,13.309 72.741,12.037 80.209,12.037 80.645,11.601 P1.3
  Bottom Layer w0.2: SPI_H1.2 56.294,54.277 67.852,54.277 67.874,54.254 68.712,54.254 72.288,50.678 72.288,46.705 74.455,44.538 74.455,21.968 76.965,19.459 76.965,15.377 74.005,12.417 72.514,12.417 v2(71.451,13.481)
SCL: P3.2 R15.2 SPI_H1.10 U1.29 U2.3 | length 110.7
  Top Layer w0.2: R15.2@21.282,41.133 U2.3 ; U1.29 45.028,43.637 46.33,42.335 53.239,42.335 53.874,42.97 53.874,43.993 57.255,47.374 58.957,47.374 59.766,48.184 59.766,49.749 SPI_H1.10
  Bottom Layer w0.2: U2.3@21.263,42.903 24.708,46.348 42.364,46.348 U1.29 ; SPI_H1.10 60.228,50.805 59.131,49.708 58.471,49.708 57.76,48.997 57.76,48.158 58.903,47.015 58.903,24.917 53.848,19.863 53.848,15.748 49.545,11.445 49.545,9.028 50.343,8.23 60.579,8.23 61.799,9.449 P3.2
SDA: P3.1 R14.2 SPI_H1.7 U1.26 U2.4 | length 88.7
  Top Layer w0.2: R14.2@22.86,41.097 22.86,41.935 27.255,46.331 52.598,46.331 ; U1.26 52.648,46.28 52.598,46.331 ; SPI_H1.7 57.795,47.777 57.088,47.777 55.641,46.331 52.598,46.331
  Bottom Layer w0.2: SPI_H1.7 59.903,49.886 63.271,49.886 63.892,49.265 63.892,48.133 ; 63.892,48.732 63.892,9.889 P3.1
TXD: P3.4 R16.2 U6.3 | length 69.1
  Top Layer w0.2: U6.3 22.386,7.817 23.749,7.817 24.13,7.436 54.712,7.436 P3.4 ; R16.2 62.808,40.03 v2(62.815,40.024)
  Bottom Layer w0.2: P3.4 56.719,11.144 61.341,15.767 61.341,17.951 61.352,17.962 61.352,20.158 62.256,21.061 62.256,39.465 v2(62.815,40.024)
User_Button1: C1.1 R11.2 U1.30 U3.1 U3.2 | length 43.1
  Top Layer w0.2: R11.2@37.019,13.59 37.019,14.583 v2(37.034,14.598)
  Top Layer w0.5: U3.1 U3.2 37.027,13.581 R11.2@37.019,13.59
  Bottom Layer w0.2: v2(37.034,14.598) 38.177,15.741 38.177,18.383 42.488,22.695 U1.30
User_Button2: C2.1 R12.2 U1.8 U4.1 U4.2 | length 37.2
  Top Layer w0.2: R12.2 41.337,14.613 40.513,15.437 40.513,18.942 41.436,19.864 58.689,19.864 U1.8
  Top Layer w0.5: R12.2 41.337,9.413 U4.1 U4.2
VCC3V3: C6.1 C7.1 C8.1 C9.1 C13.2 C14.2 R1.2 R2.2 R11.1 R12.1 R13.2 R14.1 R15.1 U1.16 U2.1 U6.8 | length 133.7
  Top Layer w0.254: R2.2@25.468,10.026 26.34,10.026 26.823,10.509 26.823,13.151 26.657,13.316
  Top Layer w0.4: 21.311,36.976 21.311,40.007 R14.1@22.809,40.007
  Top Layer w0.5: U6.8 22.392,13.342 C13.2 25.68,13.342 C14.2 25.705,14.082 R1.2 ; R11.1 R12.1 ; v2(45.619,13.836) 45.644,13.862 R13.2
  Top Layer w0.9: U2.1@16.078,42.884 16.231,42.732 16.231,37.871 17.126,36.976 21.311,36.976 76.962,36.976 78.048,38.062 U1.16 U1.16@78.036,43.696
  Top Layer w1: C14.2 26.657,13.316 32.239,13.316 33.807,14.884 35.886,16.963 35.886,36.773
  Bottom Layer w0.5: v2@33.934,14.859 35.211,13.582 v2(39.243,13.582) 45.365,13.582 v2(45.619,13.836)
  other v2: 33.96,14.884
VCC5V: C3.2 C4.2 C5.2 C15.1 C16.1 F1.2 SPI_H1.9 U1.15 | length 56.9
  Top Layer w1: SPI_H1.9 60.822,48.017 61.686,47.153 61.96,47.153 61.971,47.142 63.609,47.142 64.465,47.998 64.465,49.167 68.453,53.156 73.635,53.156 76.872,49.919 C3.2 78.283,49.919 78.298,49.904 F1.2 79.477,49.816 79.477,48.152 79.477,46.33 79.731,46.075 79.731,19.967 U1.15
VCC5V_EXT: P2.1
pads on no net: S1.1 SCREW-1.1 SCREW-2.1 SCREW-3.1 SCREW-4.1 U1.1 U1.2 U1.3 U1.4 U1.5 U1.6 U1.23 U1.24 U1.25 U1.27 U1.28 U2. U6.6 U6.7 U6.13 U6.15 U6.16 U6.17 U6.18

## Polygon pours and split planes (outlines as drawn)
GND on Top Layer "Top Layer-No Net" (solid, remove dead copper, pour order 0): 0,0 0,82.779 1.704,84.483 87.171,84.483 89.055,82.598 89.055,4 89.052,3.997 89.052,0.838 88.214,0 85.055,0
GND on Bottom Layer "Top Layer-No Net" (solid, remove dead copper, pour order 2): 0,0 0,82.779 1.704,84.483 87.171,84.483 89.055,82.598 89.055,4 89.052,3.997 89.052,0.838 88.214,0 85.055,0

## Keep-outs
Keep-Out Layer:
  the board outline again, w0.178

## Other copper
Top Layer:
  rectangle net GND: 0.298,6.02 5.715,8.514
  rectangle net GND: 0.298,14.529 5.664,16.975
  pour cut-out: 0.277,12.217 1.626,12.217 0.277,13.566
  pour cut-out: 0.277,10.82 1.626,10.82 0.277,9.472
  region net GND: 26.34,12.294 26.441,12.192 26.441,10.668 26.314,10.541 23.673,10.541 23.52,10.693 23.52,12.065 23.749,12.294

## Silkscreen, mask and mechanical layers (free items; w line width, h text height)
Top Overlay:
  text "ESP32 Interfaces Board v02b" at 50.648,2.87 h1.2
Mechanical 1:
  the board outline again, w0.178

## Text inside footprints (layer, text, board x,y; h text height)
J1: Mechanical 3 "Board Edge" at 0.32,3.425 h0.2 r90
P2: Top Overlay "GND" at 82.829,54.127 h1.27; Top Overlay "VCC5" at 82.448,46.838 h1.27